# EAGLE board Subsystem Wiring (EAGLE 9.7.0)

Size 196.97 x 239.77 mm. Coordinates in mm from the lower left corner, seen from the top.
Outline: 0,0 196.97,0 196.97,239.77 0,239.77 0,0
Copper layers (1*16): Top 0.035mm / dielectric 1.5mm / Bottom 0.035mm
Design rules "default": minimum track width 6mil, minimum drill 0.35mm, track to track 6mil, track to pad 6mil, pad to pad 6mil, via to via 6mil, smd to smd 6mil, copper to edge 40mil, drill to drill 6mil, minimum pad ring 10mil, minimum via ring 8mil, stop-mask expansion 4mil, vias tented up to drill 0mil, thermal gap 10mil

## Footprints (pad centres in the part's own frame; a part is rotated, then mirrored left to right if it is on the bottom)
BATTERY-GENERIC = drill 1.118 pad 3.15 octagon: + 2.54,0; - -2.54,0
CAP-THRU-2.54MM = drill 1.016 pad 1.88: 1 -1.27,0; 2 1.27,0
DIODE-AXIAL = drill 1: 1 -5.08,0; 2 5.08,0
1X02 = drill 1.016 long: 1 -1.27,0; 2 1.27,0
WS2812-STRIP = drill 1.016 long: 1 -3.81,0; 2 -1.27,0; 3 1.27,0; 4 3.81,0
MOTOR = drill 1.118 pad 3.15 octagon: + 2.54,0; - -2.54,0
RESAD1016W63L850D250B = drill 0.83 pad 1.43: 1 -5.08,0; 2 5.08,0
HA-06-SM065 = drill 1 pad 1.676: 1 -2.54,-2.54; 2 0,2.54; 3 2.54,-2.54
SWITCH-MOMENTARY-PTH-6.5MM = drill 1.016 pad 1.88: 1 -3.251,2.261; 2 3.251,2.261; 3 -3.251,-2.261; 4 3.251,-2.261
TO92 = drill 0.813 octagon: 1 -1.27,0; 2 0,1.905; 3 1.27,0
TO220BV = drill 1.016 long: D 0,-2.54; G -2.54,-2.54; S 2.54,-2.54
ARDUINO-UNO-R3-SHIELD = drill 1.016 pad 1.88: 3.3V 24.13,-2.54; 5V 24.13,0; A0 24.13,12.7; A1 24.13,15.24; A2 24.13,17.78; A3 24.13,20.32; A4 24.13,22.86; A5 24.13,25.4; AREF -24.13,-13.97; D2 -24.13,20.32; D3 -24.13,17.78; D4 -24.13,15.24; D5 -24.13,12.7; D6 -24.13,10.16; D7 -24.13,7.62; D8 -24.13,3.81; D9 -24.13,1.27; D10 -24.13,-1.27; D11 -24.13,-3.81; D12 -24.13,-6.35; D13 -24.13,-8.89; GND@0 24.13,2.54; GND@1 24.13,5.08; GND@2 -24.13,-11.43; IOREF 24.13,-7.62; NC 24.13,-10.16; RES 24.13,-5.08; RX -24.13,25.4; SCL -24.13,-19.05; SDA -24.13,-16.51; TX -24.13,22.86; VIN 24.13,7.62
JHD-162A = drill 1.016 long: 1 -19.05,0; 2 -16.51,0; 3 -13.97,0; 4 -11.43,0; 5 -8.89,0; 6 -6.35,0; 7 -3.81,0; 8 -1.27,0; 9 1.27,0; 10 3.81,0; 11 6.35,0; 12 8.89,0; 13 11.43,0; 14 13.97,0; 15 16.51,0; 16 19.05,0

## Placement (x,y rotation side)
BAT1  6V  [BATTERY-GENERIC]  176.13,134.9 0 top
C1  1000u  [CAP-THRU-2.54MM]  101.51,211.82 330 top
D3  DIODEDIODE-AXIAL  [DIODE-AXIAL]  190.64,167.8 90 top
L1  LIGHTBULB  [1X02]  84.97,43.97 0 top
LED1  WS2812B_STRIP  [WS2812-STRIP]  98.26,199.45 270 top
M1  MOTOR_HDR  [MOTOR]  174.56,172.73 0 top
P1  BATTERYGENERIC  [BATTERY-GENERIC]  86.28,8.26 180 top
R1  220  [RESAD1016W63L850D250B]  78,123.08 0 top
R2  470  [RESAD1016W63L850D250B]  87.66,181.38 0 top
R3  1k  [RESAD1016W63L850D250B]  113.82,175.05 0 top
R4  220  [RESAD1016W63L850D250B]  80.77,113.43 90 top
R5  100k  [RESAD1016W63L850D250B]  70.26,81.98 0 top
RPOT2  250k  [HA-06-SM065]  58.41,103.18 0 top
SCANCEL  SWITCH_MOMENTARY  [SWITCH-MOMENTARY-PTH-6.5MM]  121.16,151.82 90 top
SCONFIRM  SWITCH_MOMENTARY  [SWITCH-MOMENTARY-PTH-6.5MM]  104.54,152.16 90 top
T1  NPN  [TO92]  140.04,177.17 0 top
T2  PMOSFET  [TO220BV]  99.63,88.84 0 top
U1  ARDUINO-UNO-R3-SHIELD  [ARDUINO-UNO-R3-SHIELD]  48.41,159.64 270 top
U2  LCD-16X2JHD-162A  [JHD-162A]  30.73,232.23 0 top

## Library data of the parts
BAT1 C1 D3 L1 LED1 M1 P1 R1-R5 RPOT2 SCANCEL SCONFIRM U1 U2 = Tinkercad
T1 = Tinkercad; CATEGORY: Transistor; SUB-CATEGORY: BJT; TYPE: NPN
T2 = Tinkercad; CATEGORY: Transistor; SUB-CATEGORY: MOSFET; TYPE: P-Channel

## Nets
BAT1+: BAT1.+ D3.2 M1.+
BAT1-: BAT1.- C1.2 LED1.3 P1.- R5.1 RPOT2.1 SCANCEL.4 SCONFIRM.4 T1.3 T2.S U1.GND@0 U1.GND@1 U1.GND@2 U2.1 U2.3 U2.16
L1_2: L1.2 T2.D
LED1_DIN: LED1.1 R2.2
M1_-: D3.1 M1.- T1.1
P1+: L1.1 P1.+
T1_B: R3.2 T1.2
T2_G: R4.1 R5.2 T2.G
U1_5V: C1.1 LED1.2 R1.1 RPOT2.3 U1.5V U2.2
U1_A0: RPOT2.2 U1.A0
U1_D2: U1.D2 U2.14
U1_D3: U1.D3 U2.13
U1_D4: U1.D4 U2.12
U1_D5: U1.D5 U2.11
U1_D6: R2.1 U1.D6
U1_D7: SCONFIRM.2 U1.D7
U1_D8: R4.2 U1.D8
U1_D9: SCANCEL.2 U1.D9
U1_D10: R3.1 U1.D10
U1_D11: U1.D11 U2.6
U1_D12: U1.D12 U2.4
U2_LED+: R1.2 U2.15

## Tracks (layer width: path | path; a pad name or v marks a point on that pad's centre or on a via)
BAT1+  (2 unrouted)
BAT1-  (15 unrouted)
L1_2  (1 unrouted)
LED1_DIN  (1 unrouted)
M1_-  (2 unrouted)
P1+  (1 unrouted)
T1_B  (1 unrouted)
T2_G  (2 unrouted)
U1_5V  (5 unrouted)
U1_A0  (1 unrouted)
U1_D2  (1 unrouted)
U1_D3  (1 unrouted)
U1_D4  (1 unrouted)
U1_D5  (1 unrouted)
U1_D6  (1 unrouted)
U1_D7  (1 unrouted)
U1_D8  (1 unrouted)
U1_D9  (1 unrouted)
U1_D10  (1 unrouted)
U1_D11  (1 unrouted)
U1_D12  (1 unrouted)
U2_LED+  (1 unrouted)